# Altium PCB PCB2.PcbDoc
Units mm, origin at the board's own origin, x right, y up, seen from the top; angles counter-clockwise.
Board outline 37 x 50 mm, 2 copper layers (Top Layer, Bottom Layer); 70 components, 56 nets, 273 pads, 147 vias.
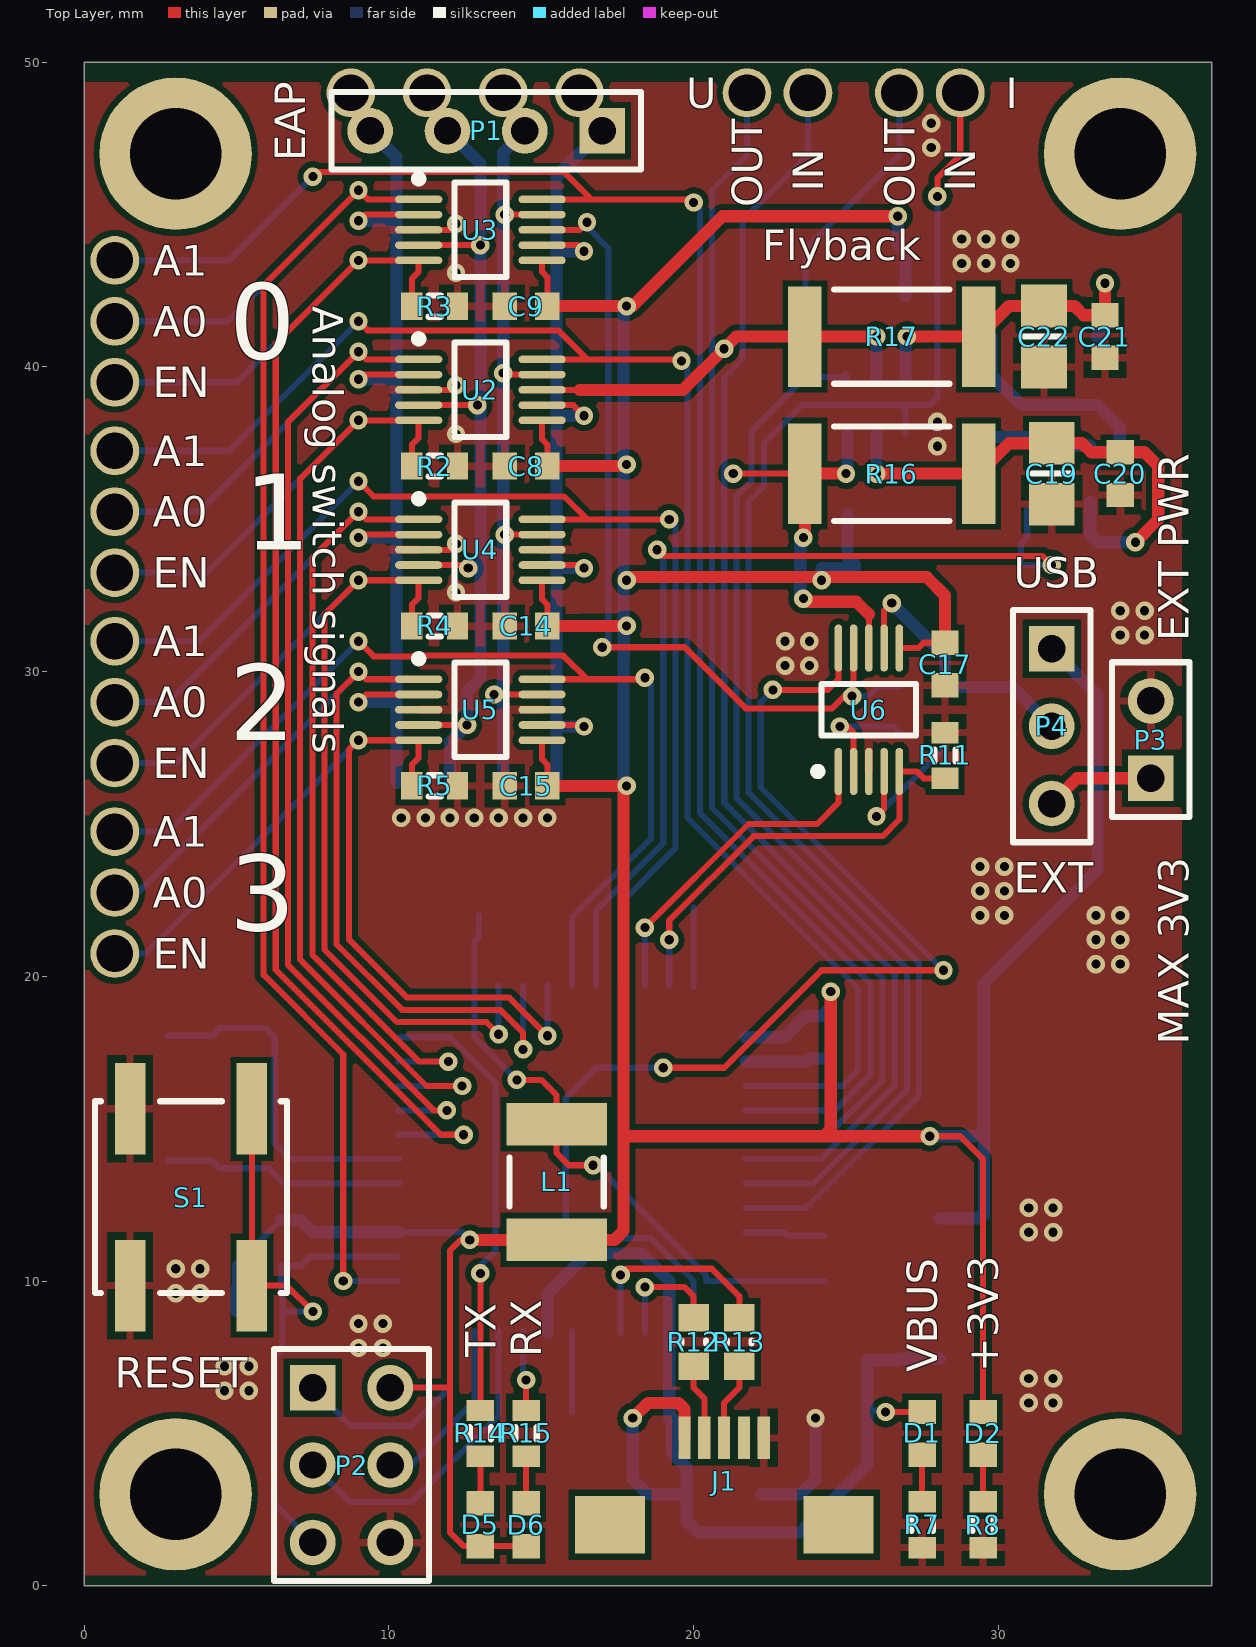
[diagram p0: Top Layer view]
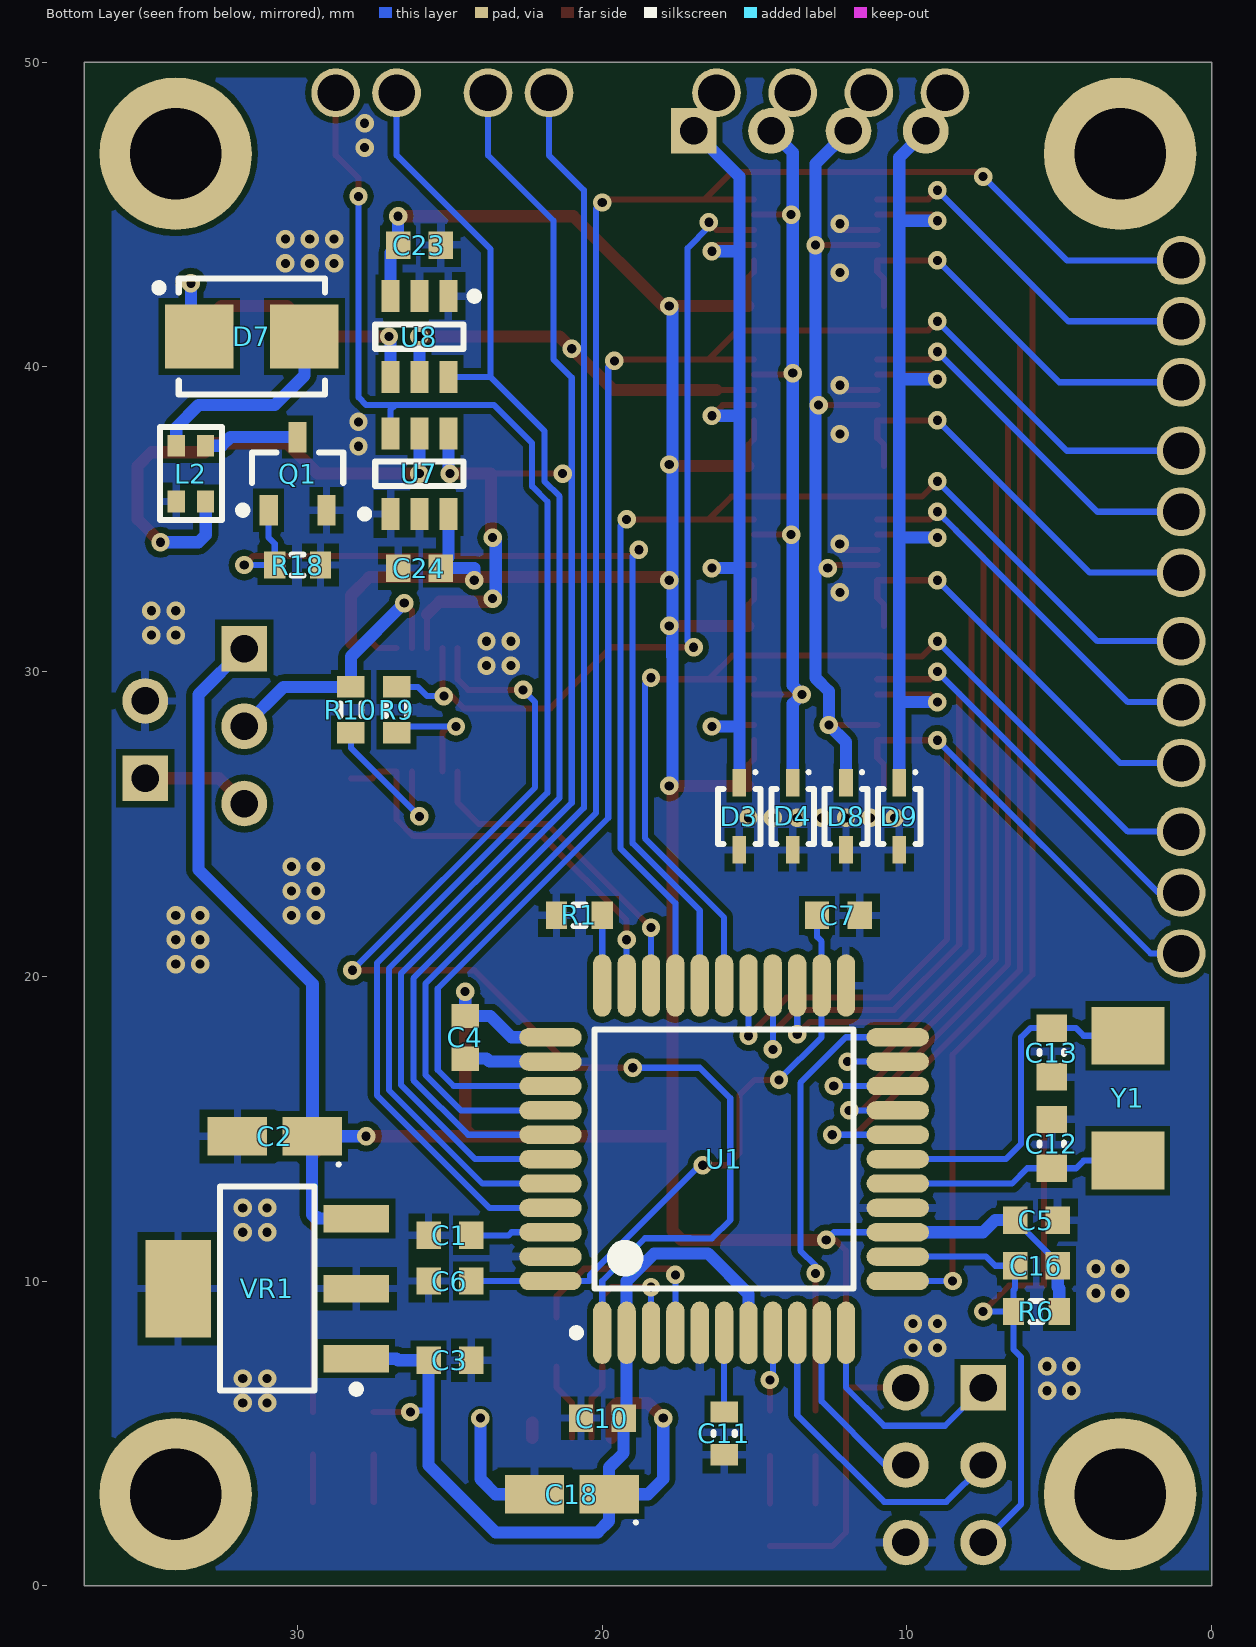
[diagram p1: Bottom Layer view, seen from below]

## Layer stack, top to bottom
Top Solder: solder mask 0.0102, Solder Resist, Dk 3.5
Top Layer: signal copper 0.0356
Dielectric 1: dielectric 0.32, FR-4, Dk 4.8
Bottom Layer: signal copper 0.0356
Bottom Solder: solder mask 0.0102, Solder Resist, Dk 3.5

## Board outline
0,0 37,0 37,50 0,50

## Design rules (kind name [scope] priority, off if disabled: settings)
Clearance "GND polygon clearance" [InNamedPolygon('Bottom Layer-GND') Or  InNamedPolygon('Top Layer-GND')] p1: gap=0.2
Clearance [All] p2: gap=0.2
HoleSize [All] p1: absolutevalues=TRUE maxlimit=6.35 minlimit=0.3 maxpercent=80.000 minpercent=20.000
MinimumAnnularRing [All] p1: minimumring=0.152
MinimumSolderMaskSliver [All] p1: minsoldermaskwidth=0.1
PolygonConnect ViaStiching [IsVia] p1: connectstyle=Direct reliefconductorwidth=0.254 reliefentries=4 polygonreliefangle="90 Angle" airgapwidth=0.254
PolygonConnect [All] p2: connectstyle=Relief reliefconductorwidth=0.254 reliefentries=4 polygonreliefangle="90 Angle" airgapwidth=0.254
RoutingVias [All] p1: holewidth=0.3 width=0.605 viastyle="Through Hole" minholewidth=0.3 minwidth=0.605 maxholewidth=6.35 maxwidth=10
SMDNeckDown [All] p1: percent=100.000
SilkToSolderMaskClearance [IsPad] p1: minsilkscreentomaskgap=0.178 clearancetoexposedcopper=TRUE
SolderMaskExpansion "Vias Covered" [IsVia And (Not IsTestpoint)] p1: expansion=-1270
SolderMaskExpansion "Default All" [All] p2: expansion=0.102
UnpouredPolygon [All] p1: allowunpoured=FALSE
Width "Power lines" [(InNet('3V3') OR InNet('GND') Or InNet('VBUS') Or InNet('EXT_VCC'))] p1: maxlimit=0.5 minlimit=0.2 preferedwidth=0.4
Width [All] p2: maxlimit=0.5 minlimit=0.152 preferedwidth=0.2
26 further rules are at their usual default settings.

## Classes and differential pairs
component class Flyback: C19 C20 C21 C22 C23 C24 D7 L2 Q1 R16 R17 R18 U7 U8

## Components (designator, comment, footprint, x,y, rotation, side; value= is the part's Value field where it differs from the comment)
C1 "Cap Semi" 1608[0603] 25,11.5 r0 bottom
C2 "min 10uF" CAPMP3216X18N 30.75,14.75 r0 bottom
C3 "Cap Semi" 1608[0603] 25,7.4 r0 bottom
C4 "Cap Semi" 1608[0603] 24.5,18 r90 bottom
C5 "Cap Semi" 1608[0603] 5.75,12 r0 bottom
C6 "Cap Semi" 1608[0603] 25,10 r180 bottom
C7 "Cap Semi" 1608[0603] 12.25,22 r0 bottom
C8 "Cap Semi" 1608[0603] 14.5,36.75 r0 top
C9 "Cap Semi" 1608[0603] 14.5,42 r0 top
C10 "Cap Semi" 1608[0603] 20,5.5 r180 bottom
C11 "CAP 1uF 25V 0603(1608)" CAPC0603(1608)100_L 16,5 r90 bottom
C12 "CAP 27pF 50V 0603(1608)" CAPC0603(1608)100_N 5.25,14.5 r270 bottom
C13 "CAP 27pF 50V 0603(1608)" CAPC0603(1608)100_N 5.25,17.5 r90 bottom
C14 "Cap Semi" 1608[0603] 14.5,31.5 r0 top
C15 "Cap Semi" 1608[0603] 14.5,26.25 r0 top
C16 "Cap Semi" 1608[0603] 5.75,10.5 r180 bottom
C17 "Cap Semi" 1608[0603] 28.25,30.25 r90 top
C18 "10uF" CAPMP3216X18N 21,3 r0 bottom
C19 "Cap Semi" 6-0805_M 31.75,36.5 r90 top
C20 "Cap Semi" 1608[0603] 34,36.5 r90 top
C21 "Cap Semi" 1608[0603] 33.5,41 r90 top
C22 "Cap Semi" 6-0805_M 31.5,41 r90 top
C23 "Cap Semi" 1608[0603] 26,44 r0 bottom
C24 "Cap Semi" 1608[0603] 26,33.4 r180 bottom
D1 "Blue" 1608[0603] 27.5,5 r270 top
D2 "Green" 1608[0603] 29.5,5 r270 top
D3 "PMEG2005AEA" SOD323F 15.5,25.25 r270 bottom
D4 "PMEG2005AEA" SOD323F 13.75,25.25 r270 bottom
D5 "Green" 1608[0603] 13,2 r90 top
D6 "Yellow" 1608[0603] 14.5,2 r90 top
D7 "VS-10BQ030PbF" "VS-10BQ030PbF - DIOM4435X24N" 31.5,41 r180 bottom
D8 "PMEG2005AEA" SOD323F 12,25.25 r270 bottom
D9 "PMEG2005AEA" SOD323F 10.25,25.25 r270 bottom
J1 "USB micro B" "FCI MICRO USB B Receptable" 21,2 r0 top
L1 "Inductor" INDC4532 15.5,13.25 r90 top
L2 "COILCRAFT-PFD2015 (Rev)" PFD2015 33.5,36.5 r90 bottom
P1 "Header 4" HDR1X4 17,47.75 r180 top
P2 "ISCP" HDR2X3 7.5,6.5 r270 top
P3 "Header 2" HDR1X2 35,26.5 r90 top
P4 "Jumper" HDR1X3 31.75,30.75 r270 top
Q1 "IRFML8244TRPBF" SOT95P237X112-3N 30,36.5 r90 bottom
R1 "Res3" J1-0603 20.75,22 r180 bottom
R2 "Res3" J1-0603 11.5,36.75 r0 top
R3 "Res3" J1-0603 11.5,42 r0 top
R4 "Res3" J1-0603 11.5,31.5 r0 top
R5 "Res3" J1-0603 11.5,26.25 r0 top
R6 "Res3" J1-0603 5.75,9 r180 bottom
R7 "Res3" J1-0603 27.5,2 r90 top
R8 "Res3" J1-0603 29.5,2 r90 top
R9 "Res3" J1-0603 26.75,28.75 r270 bottom
R10 "Res3" J1-0603 28.25,28.75 r270 bottom
R11 "Res3" J1-0603 28.25,27.25 r90 top
R12 "22R 5% 0603(1608)" RESC0603(1608)_N 20,8 r90 top
R13 "22R 5% 0603(1608)" RESC0603(1608)_N 21.5,8 r90 top
R14 "Res3" J1-0603 13,5 r270 top
R15 "Res3" J1-0603 14.5,5 r270 top
R16 "Res3" RESC6332 26.5,36.5 r0 top
R17 "Res3" RESC6332 26.5,41 r180 top
R18 "Res3" J1-0603 30,33.5 r180 bottom
S1 "KSEM31J" KSEM31J 3.5,12.75 r90 top
U1 "ATmega32U4-AU" 44ML_M 16,14 r90 bottom
U2 "ADG804YRMZ" ADI-RM-10_L 13,39.25 r0 top
U3 "ADG804YRMZ" ADI-RM-10_L 13,44.5 r0 top
U4 "ADG804YRMZ" ADI-RM-10_L 13,34 r0 top
U5 "ADG804YRMZ" ADI-RM-10_L 13,28.75 r0 top
U6 "ADG804YRMZ" ADI-RM-10_L 25.75,28.75 r90 top
U7 "ADM4073" "ADM4073 - SOT95P280X145-6N" 26,36.5 r90 bottom
U8 "ADM4073" "ADM4073 - SOT95P280X145-6N" 26,41 r270 bottom
VR1 "LM2937" "LM2937 - SOT230P700X180-4N" 31,9.75 r0 bottom
Y1 "Abracon ABM3 Crystal" ABM3 2.75,16 r90 bottom

## Footprints (in the part's own frame and the unit in brackets; to place one, negate y for a bottom-side part, rotate by r counter-clockwise, add the part's x,y. Pads: shape width x height; smd on the part's side, far side on the other; paste and mask are expansions set on the pad)
6-0805_M [mm] "Chip Resistor, Body 2.0x1.2mm, IPC Low Density"
  rect 1.4x1.5 smd: 1(-1,0) 2(1,0)
  silkscreen extent 0,-0.65 0,0.65, body extent -1.07,-0.7 1.07,0.7, height 0.7
44ML_M [mm] "Thin QFP, 44-Leads, Body 10x10mm, Pitch 0.8mm, IPC Low Density"
  oval 2.05x0.6 smd: 1(-5.7,4) 2(-5.7,3.2) 3(-5.7,2.4) 4(-5.7,1.6) 5(-5.7,0.8) 6(-5.7,0) 7(-5.7,-0.8) 8(-5.7,-1.6) 9(-5.7,-2.4) 10(-5.7,-3.2) 11(-5.7,-4) 23(5.7,-4) 24(5.7,-3.2) 25(5.7,-2.4) 26(5.7,-1.6) 27(5.7,-0.8) 28(5.7,0) 29(5.7,0.8) 30(5.7,1.6) 31(5.7,2.4) 32(5.7,3.2) 33(5.7,4)
  oval 0.6x2.05 smd: 12(-4,-5.7) 13(-3.2,-5.7) 14(-2.4,-5.7) 15(-1.6,-5.7) 16(-0.8,-5.7) 17(0,-5.7) 18(0.8,-5.7) 19(1.6,-5.7) 20(2.4,-5.7) 21(3.2,-5.7) 22(4,-5.7) 34(4,5.7) 35(3.2,5.7) 36(2.4,5.7) 37(1.6,5.7) 38(0.8,5.7) 39(0,5.7) 40(-0.8,5.7) 41(-1.6,5.7) 42(-2.4,5.7) 43(-3.2,5.7) 44(-4,5.7)
  silkscreen extent -5.82,-4.25 4.25,4.98, body extent -5,-5 5,5, height 1.2
1608[0603] [mm] "Chip Capacitor, Body 1.6x0.8mm, IPC High Density"
  rect 0.8x0.9 smd: 1(-0.7,0) 2(0.7,0)
  body extent -0.87,-0.48 0.87,0.48, height 1.3
ABM3 [mm]
  rect 1.9x2.4 smd: 1(-2.05,0) 2(2.05,0)
  body extent -2.5,-1.6 2.5,1.6, height 1.3
ADI-RM-10_L [mm] "SOP, 10-Leads, Body 3x3mm, Pitch 0.5mm, IPC High Density"
  oval 1.55x0.25 smd: 1(-2.025,1) 2(-2.025,0.5) 3(-2.025,0) 4(-2.025,-0.5) 5(-2.025,-1) 6(2.025,-1) 7(2.025,-0.5) 8(2.025,0) 9(2.025,0.5) 10(2.025,1)
  silkscreen extent -2.15,-1.55 0.85,1.8, body extent -1.55,-1.55 1.55,1.55, height 1.1
"ADM4073 - SOT95P280X145-6N" [mm] "SOT23, 6-Leads, Body 2.90x2.80mm, Pitch 0.95mm, IPC Medium Density"
  rect 1.05x0.6 smd: 1(-1.325,0.95) 2(-1.325,0) 3(-1.325,-0.95) 4(1.325,-0.95) 5(1.325,0) 6(1.325,0.95)
  silkscreen extent -1.45,-1.45 0.4,1.93, body extent -0.8,-1.45 0.8,1.45, height 1.45
CAPC0603(1608)100_L [mm] "Chip Capacitor, Body 1.6x0.8mm, Height 1.0mm, IPC High Density"
  rect 0.7x0.9 smd: 1(-0.7,0) 2(0.7,0)
  silkscreen extent -0.05,-0.35 0.05,0.35, body extent -0.87,-0.47 0.88,0.48, height 1
CAPC0603(1608)100_N [mm] "Chip Capacitor, Body 1.6x0.8mm, Height 1.0mm, IPC Medium Density"
  rect 0.9x1 smd: 1(-0.8,0) 2(0.8,0)
  silkscreen extent -0.05,-0.4 0.05,0.4, body extent -0.87,-0.48 0.88,0.47, height 1
CAPMP3216X18N [mm] "Molded Capacitor, 2-Leads, Body 3.20x1.60mm, IPC Medium Density"
  rect 1.95x1.25 smd: 1(1.225,0) 2(-1.225,0)
  silkscreen extent -2.15,0.88 -2.05,0.97, body extent -1.7,-0.9 1.7,0.9, height 1.8
"FCI MICRO USB B Receptable" [mm]
  rect 2.3x1.9 smd: Case(-3.75,0) Case(3.75,0)
  rect 0.4x1.4 smd: D+(0,2.85) D-(-0.65,2.85) GND(1.3,2.85) ID(0.65,2.85) Vbus(-1.3,2.85)
  body extent -4,-2.75 4,2.85, height 2.95
HDR1X2 [mm] "Connector; Header; 2 Position"
  rect 1.5x1.5 hole 0.9: 1(0,0)
  round 1.5 hole 0.9: 2(2.54,0)
  silkscreen extent -1.27,-1.27 3.81,1.27
HDR1X3 [mm] "Connector; Header; 3 Position"
  rect 1.5x1.5 hole 0.9: 1(0,0)
  round 1.5 hole 0.9: 2(2.54,0) 3(5.08,0)
  silkscreen extent -1.27,-1.27 6.35,1.27
HDR1X4 [mm] "Connector; Header; 4 Position"
  rect 1.5x1.5 hole 0.9: 1(0,0)
  round 1.5 hole 0.9: 2(2.54,0) 3(5.08,0) 4(7.62,0)
  silkscreen extent -1.27,-1.27 8.89,1.27
HDR2X3 [mm] "Connector; Header; 3x2 Position"
  rect 1.5x1.5 hole 0.9: 1(0,0)
  round 1.5 hole 0.9: 2(0,2.54) 3(2.54,0) 4(2.54,2.54) 5(5.08,0) 6(5.08,2.54)
  silkscreen extent -1.27,-1.27 6.35,3.81
INDC4532 [mm] "Chip Inductor, Body 4.5x3.2mm, IPC High Density"
  rect 1.4x3.3 smd: 1(-1.9,0) 2(1.9,0)
  silkscreen extent -0.8,-1.55 0.8,1.55, body extent -2.4,-1.7 2.4,1.7, height 0.55
J1-0603 [mm] "Chip Resistor, Body 1.6x0.8mm, IPC High Density"
  rect 0.7x0.9 smd: 1(-0.75,0) 2(0.75,0)
  silkscreen extent -0.2,-0.35 0.2,0.35, body extent -0.85,-0.48 0.85,0.48, height 0.9
KSEM31J [mm] "Tactile switch"
  rect 3x1 smd: 0(-2.9,-2) 0(2.9,-2) 1(-2.9,2) 1(2.9,2)
  silkscreen extent -3.15,-3.15 3.15,3.15
"LM2937 - SOT230P700X180-4N" [mm] "SOT223, 4-Leads, Body 6.50x7.00mm (avg), Pitch 2.30mm, IPC Medium Density"
  rect 2.15x0.9 smd: 1(-2.925,2.3) 2(-2.925,0) 3(-2.925,-2.3)
  rect 2.15x3.2 smd: 4(2.925,0)
  silkscreen extent -3.05,-3.35 1.55,3.42, body extent -1.85,-3.35 1.85,3.35, height 1.8
PFD2015 [mil] "Coupled inductor"
  rect 28x22 smd: 1(-36,-19) 2(36,-19) 3(36,19) 4(-36,19)
  silkscreen extent -60,-40 60,40
RESC0603(1608)_N [mm] "Chip Resistor, Body 1.6x0.8mm, IPC Medium Density"
  rect 0.9x1 smd: 1(-0.8,0) 2(0.8,0)
  silkscreen extent -0.05,-0.4 0.05,0.4, body extent -0.85,-0.47 0.85,0.47, height 0.6
RESC6332 [mm] "Chip Resistor, Body 6.3x3.2mm, IPC High Density"
  rect 1.1x3.3 smd: 1(-2.85,0) 2(2.85,0)
  silkscreen extent -1.9,-1.55 1.9,1.55, body extent -3.22,-1.68 3.22,1.68, height 0.9
SOD323F [mm] "SODFL, 2-Leads, Body 1.25x2.50mm, IPC Medium Density"
  rect 0.9x0.45 smd: 1(-1.1,0) 2(1.1,0)
  silkscreen extent -1.5,-0.7 0.9,0.7, body extent -0.9,-0.67 0.9,0.67, height 0.8
SOT95P237X112-3N [mm] "SOT23, 3-Leads, Body 2.92x2.37mm, Pitch 0.95mm, IPC Medium Density"
  rect 1x0.6 smd: 1(-1.2,0.95) 2(-1.2,-0.95) 3(1.2,0)
  silkscreen extent -1.32,-1.5 0.7,1.93, body extent -0.7,-1.52 0.7,1.52, height 1.12
"VS-10BQ030PbF - DIOM4435X24N" [mm] "Molded Diode, 2-Leads, Body 4.40x3.55mm, IPC Medium Density"
  rect 2.25x2.1 smd: 1(-1.725,0) 2(1.725,0)
  silkscreen extent -3.18,-1.9 2.4,1.9, body extent -2.35,-1.9 2.35,1.9, height 2.4

## Part data
C1 C3 C4 C5 C6 C7 C8 C9 C10 C14 C15 C16 C17 C19 C20 C21 C22 C23 C24: "Capacitor (Semiconductor SIM Model)"
C2 C18: library part Tantalum
C11: library part CMP-1035-00880-1
C12 C13: library part CMP-1035-00010-1
D1 D2 D5 D6: library part LED2, "Typical RED, GREEN, YELLOW, AMBER GaAs LED"
P1: "Header, 4-Pin"
P2: library part "Header 3X2", "Header, 3-Pin, Dual row"
P3: "Header, 2-Pin"
P4: library part "Header 3", "Header, 3-Pin"
Q1: "INTERNATIONAL RECTIFIER - IRFML8244TRPBF - N CH MOSFET, 25V, 5.8A, 3-SOT-23, FULL REEL"
R1 R2 R3 R4 R5 R6 R7 R8 R9 R10 R11 R14 R15 R16 R17 R18: "Resistor"
R12 R13: library part CMP-1012-00034-1, "22R 0.1W 5% 0603 (1608 Metric)  SMD"
U1: library part CMP-0095-00285-2, "8-bit AVR Microcontroller, 2.7-5.5V, 16MHz, 32KB Flash, 1KB EEPROM, 2.5KB SRAM, USB Controller, 44-pin TQFP, Industrial Grade (-40°C to 85°C), Ext Osc"
U2 U3 U4 U5 U6: library part CMP-0798-00106-1, "1.65 to 3.6 V, CMOS, 0.5 Ohm, 4-Channel Multiplexer, -40 to 125 degC, 10-pin SOP (RM-10), Tube"

## Free pads (board coordinates)
  round 5 hole 3: Mount(3,3) Mount(3,47) Mount(34,3) Mount(34,47)
  round 1.6 hole 1.2: ""(1,20.75) ""(1,22.75) ""(1,24.75) ""(1,27) ""(1,29) ""(1,31) ""(1,33.25) ""(1,35.25) ""(1,37.25) ""(1,39.5) ""(1,41.5) ""(1,43.5) ""(8.75,49) ""(11.25,49) ""(13.75,49) ""(16.25,49) ""(21.75,49) ""(23.75,49) ""(26.75,49) ""(28.75,49)

## Via types
v1: diameter 0.605, hole 0.3, Top Layer to Bottom Layer, 147 vias

## Nets (pads, with @x,y where several pads share a name; then routed paths per layer and width w, separated by ;. In a path a pad name is that pad's centre, name@x,y a point inside that pad or via, vN(x,y) a via of type N, cw(c..) or ccw(c..) an arc to the next point about the centre after c; other vN are vias at no path point)
3V3: C2.2 C4.2 C5.2 C8.2 C9.2 C14.2 C15.2 C16.2 C17.2 C23.2 C24.2 D2.1 D5.1 D6.1 L1.1 P2.2 P4.1 R6.2 U1.14 U1.34 U2.6 U3.6 U4.6 U5.6 U6.6 U7.3 U8.3 VR1.3 | length 165.3
  Top Layer w0.2: P2.2 12,6.5 ; v1(12.65,11.35) 12.35,11.35 12,11 12,6.5 ; D6.1 D5.1 12.45,1.3 12,1.75 12,6.5 ; U5.6 15.025,27.125 15.2,26.95 C15.2 ; U4.6 15.025,32.375 15.2,32.2 C14.2 ; U2.6 15.025,37.625 15.2,37.45 C8.2 ; U3.6 15.025,43.125 15.2,42.95 C9.2 ; U6.6 27.375,30.775 27.55,30.95 C17.2 ; v1(27.75,14.75) 28.75,14.75 29.5,14 D2.1
  Top Layer w0.4: v1(12.65,11.35) L1.1 17.4,11.35 17.697,11.648 17.697,26.147 v1(17.8,26.25) C15.2 ; C8.2 17.75,36.75 v1(17.8,36.8) ; C14.2 16.307,31.5 16.309,31.502 v1(17.8,31.502) ; C9.2 v1(17.8,42) 18,42 20.95,44.95 v1(26.7,44.95) ; 17.697,14.75 24.25,14.75 ; v1(17.8,33) 17.903,33.103 27.647,33.103 28.25,32.5 C17.2 ; v1(24.5,19.5) 24.5,15 24.25,14.75 ; v1(27.75,14.75) 24.25,14.75
  Bottom Layer w0.2: C16.2 5.05,10.6 C5.2 ; U1.14 12.4,11.6 v1(12.65,11.35) ; C4.2@24.25,18.7 C4.2@24.25,18.75
  Bottom Layer w0.4: R6.2 5,9.75 5.05,9.8 C16.2 ; C5.2 7.1,12 7.5,11.6 U1.14 ; v1(17.8,26.25) 17.697,26.353 17.697,30.504 17.702,30.509 17.702,31.091 17.697,31.096 17.697,41.897 v1(17.8,42) ; U1.34 22.975,18 23.675,18.7 C4.2@24.25,18.7 ; v1(24.2,33) 24.2,33.4 C24.2@25.2,33.4 ; C4.2@24.25,18.75 24.5,19 v1(24.5,19.5) ; U7.3 25.05,33.75 25.3,33.5 C24.2@25.2,33.4 ; C24.2 C24.2@25.2,33.4 ; v1(26.7,44.95) C23.2 26.95,43.75 U8.3 ; v1(27.75,14.75) 29.5,14.75 29.5,19.75 29.525,19.775 ; VR1.3 29.3,12.05 29.35,12.1 ; 29.4,12.05 29.525,12.175 C2.2 29.525,19.775 ; P4.1 33.25,29.25 33.25,23.5 29.525,19.775
A0_0: pad.@1,41.5 U1.12 U3.1 | length 51.9
  Top Layer w0.2: v1(8.5,10) 8.5,17.434 5.883,20.051 5.883,42.683 v1(9,45.8) 9.3,45.5 U3.1
  Bottom Layer w0.2: pad.@1,41.5 4.7,41.5 v1(9,45.8) ; v1(8.5,10) U1.12
A0_1: pad.@1,35.25 U1.19 U2.1 | length 42.1
  Top Layer w0.2: U2.1 9.25,40.25 v1(9,40.5) 6.683,38.183 6.683,20.382 11.466,15.6 v1(11.9,15.6)
  Bottom Layer w0.2: pad.@1,35.25 3.75,35.25 v1(9,40.5) ; U1.19 v1(11.9,15.6)
A0_2: pad.@1,29 U1.21 U4.1 | length 35.4
  Top Layer w0.2: U4.1 9.252,35 9.002,35.25 v1(9,35.25) 8.998,35.25 7.483,33.735 7.483,20.714 10.997,17.2 v1(11.95,17.2)
  Bottom Layer w0.2: pad.@1,29 2.75,29 8.397,34.647 8.397,34.65 8.998,35.25 v1(9,35.25) ; U1.21 v1(11.95,17.2)
A0_3: pad.@1,22.75 U1.26 U5.1 | length 32.3
  Top Layer w0.2: U5.1 9.25,29.75 v1(9,30) 8.283,29.283 8.283,21.045 10.428,18.9 13.652,18.9 14.4,18.152 v1(14.4,17.6)
  Bottom Layer w0.2: pad.@1,22.75 1.75,22.75 v1(9,30) ; v1(14.4,17.6) U1.26
A0_4: U1.31 U6.1 | length 11
  Top Layer w0.2: v1(18.4,21.6) 21.8,25 24.05,25 24.75,25.7 U6.1
  Bottom Layer w0.2: U1.31 v1(18.4,21.6)
A1_0: pad.@1,43.5 U1.37 U3.10 | length 58
  Top Layer w0.2: v1(7.5,46.25) 7.652,46.402 15.735,46.402 16.6,45.538 16.6,45.5 ; U3.10 16.6,45.5 ; v1(20,45.4) 20.1,45.5 16.6,45.5
  Bottom Layer w0.2: pad.@1,43.5 4.75,43.5 v1(7.5,46.25) ; v1(20,45.4) 20.202,45.198 20.202,40.45 20.202,34.585 20.202,25.363 25.8,19.766 25.8,16.76 24.64,15.6 U1.37
A1_1: pad.@1,37.25 U1.36 U2.10 | length 52
  Top Layer w0.2: v1(9,41.5) 9.3,41.2 15.55,41.2 16.5,40.25 ; U2.10 16.5,40.25 ; v1(19.6,40.2) 19.55,40.25 16.5,40.25
  Bottom Layer w0.2: pad.@1,37.25 4.75,37.25 v1(9,41.5) ; v1(19.6,40.2) 19.802,39.998 19.802,35.25 19.803,34.75 19.802,25.198 25.4,19.6 25.4,16.926 24.874,16.4 U1.36
A1_2: pad.@1,31 U1.30 U4.10 | length 40
  Top Layer w0.2: v1(9,36.25) 9.5,35.75 15.75,35.75 16.5,35 ; v1(19.2,35) 16.5,35 ; 16.5,35 U4.10 16.5,35
  Bottom Layer w0.2: pad.@1,31 3.75,31 v1(9,36.25) ; U1.30 17.6,22.4 19.402,24.202 19.402,34.249 19.4,34.252 19.4,34.8 v1(19.2,35)
A1_3: pad.@1,24.75 U1.28 U5.10 | length 35.2
  Top Layer w0.2: v1(9,31) 9.5,30.5 10.784,30.5 10.809,30.525 15.725,30.525 16.5,29.75 ; v1(18.4,29.8) 18.55,29.8 18.6,29.75 16.5,29.75 ; 16.5,29.75 U5.10 16.5,29.75
  Bottom Layer w0.2: pad.@1,24.75 2.75,24.75 v1(9,31) ; U1.28 16,21.931 18.603,24.534 18.603,29.597 v1(18.4,29.8)
A1_4: U1.1 U6.10 | length 40
  Top Layer w0.2: v1(19,17) 21,17 24.2,20.2 v1(28.2,20.2) ; v1(22.6,29.4) 24.4,29.4 24.75,29.75 U6.10
  Bottom Layer w0.2: v1(19,17) 16.8,17 15.8,16 15.8,12 16.4,11.4 17.099,11.4 17.102,11.402 18.597,11.402 20,10 U1.1 ; v1(22.6,29.4) 22.202,29.002 22.202,26.198 v1(28.2,20.2)
EAP_IN: pad.@21.75,49 R17.2 U1.38 U2.8 U8.5 | length 53.9
  Top Layer w0.2: U2.8 16.25,39.25
  Top Layer w0.4: 16.25,39.25 19.65,39.25 v1(21,40.6) 21.4,41 R17.2 v1(26,41)
  Bottom Layer w0.2: 20.602,40.6 v1(21,40.6) ; 20.602,40.615 20.602,34.419 20.602,25.529 26.2,19.931 26.2,16.594 24.406,14.8 U1.38 ; 20.602,40.615 20.602,45.15 20.603,45.65 20.602,45.802 21.75,46.95 pad.@21.75,49
  Bottom Layer w0.4: U8.5 v1(26,41)
EAP_IN_CURRENT: pad.@26.75,49 U1.40 U8.6 | length 45.3
  Bottom Layer w0.2: U1.40 23.937,13.2 27,16.263 27,20.263 21.402,25.86 21.402,34.088 21.402,35.75 21.903,36.25 21.903,37.902 23.675,39.675 ; U8.6@24.975,39.75 U8.6 23.675,39.675 ; pad.@26.75,49 26.75,46.95 23.675,43.875 23.675,39.675
EAP_OUT: R9.1 U3.8 U6.9 | length 28.3
  Top Layer w0.2: U3.8 16.25,44.5 v1(16.5,44.75) ; v1(17,30.8) 19.7,30.8 21.703,28.797 24.545,28.797 24.973,29.225 v1@25.175,29.225 ; v1@25.2,29.25 25.25,29.3 U6.9
  Bottom Layer w0.2: v1(16.5,44.75) 16.5,44.602 17.2,43.902 17.2,42.252 17.197,42.25 17.197,32.75 17.197,30.997 v1(17,30.8) ; v1(25.2,29.2) 25.75,29.2 26.05,29.5 R9.1
EN_0: pad.@1,39.5 R3.1 U1.18 U3.5 | length 48.2
  Top Layer w0.2: R3.1 10.75,42.9 10.975,43.125 U3.5 v1(9,43.5) 6.283,40.783 6.283,20.217 11.7,14.8 v1(12.45,14.8)
  Bottom Layer w0.2: pad.@1,39.5 5,39.5 v1(9,43.5) ; U1.18 v1(12.45,14.8)
EN_1: pad.@1,33.25 R2.1 U1.20 U2.5 | length 41.3
  Top Layer w0.2: R2.1 10.75,37.45 10.975,37.675 U2.5 v1(9,38.25) 7.083,36.333 7.083,20.548 11.231,16.4 v1(12.4,16.4)
  Bottom Layer w0.2: pad.@1,33.25 4,33.25 v1(9,38.25) ; U1.20 v1(12.4,16.4)
EN_2: pad.@1,27 R4.1 U1.25 U4.5 | length 35.1
  Top Layer w0.2: R4.1 10.75,32.2 10.975,32.425 U4.5 v1(9,33) 7.883,31.883 7.883,20.88 10.263,18.5 13.2,18.5 v1(13.6,18.1)
  Bottom Layer w0.2: pad.@1,27 3,27 v1(9,33) ; v1(13.6,18.1) U1.25
EN_3: pad.@1,20.75 R5.1 U1.27 U5.5 | length 30.6
  Top Layer w0.2: R5.1 10.75,26.95 10.975,27.175 U5.5 v1(9,27.75) 8.683,27.433 8.683,21.211 10.594,19.3 13.95,19.3 v1(15.2,18.05)
  Bottom Layer w0.2: pad.@1,20.75 2,20.75 v1(9,27.75) ; v1(15.2,18.05) U1.27
EN_4: R11.1 U1.32 U6.5 | length 14.2
  Top Layer w0.2: v1(19.2,21.2) 19.2,21.834 21.966,24.6 26.202,24.6 26.75,25.148 U6.5 27.325,26.725 27.55,26.5 R11.1
  Bottom Layer w0.2: U1.32 v1(19.2,21.2)
EXT_VCC: P3.1 P4.3 | length 3.6
  Top Layer w0.4: P4.3 32.58,26.5 P3.1
FLYBACK_CONTROL: Q1.1 R18.1 U1.29 | length 31.3
  Top Layer w0.2: v1(18.8,34) 19.002,33.797 23.85,33.797 23.852,33.8 31.45,33.8 v1(31.75,33.5)
  Bottom Layer w0.2: U1.29 16.8,22.166 19.002,24.368 19.002,33.797 v1(18.8,34) ; Q1.1 30.95,34.4 30.75,34.2 R18.1 v1(31.75,33.5)
FLYBACK_IN: pad.@23.75,49 R16.1 U1.39 U6.8 U7.4 | length 54.7
  Top Layer w0.2: v1(21.3,36.5) R16.1 ; U6.8 25.75,31.885
  Top Layer w0.4: v1(23.6,32.4) 23.703,32.297 25.337,32.297 25.75,31.885 ; v1(23.6,34.4) 23.65,34.45 R16.1 v1(25,36.5)
  Bottom Layer w0.2: U1.39 24.171,14 26.6,16.429 26.6,20.097 21.002,25.695 21.002,34.253 21.002,39.652 21.603,40.253 21.603,40.85 21.6,40.852 21.6,44.8 23.75,46.95 pad.@23.75,49
  Bottom Layer w0.4: v1(23.6,32.4) 23.497,32.503 23.497,34.297 v1(23.6,34.4) ; v1(25,36.5) 25.05,36.55 U7.4
FLYBACK_IN_CURRENT: pad.@28.75,49 U1.41 U7.6 | length 48.8
  Top Layer w0.2: v1(28,45.6) 28,46.2 28.75,46.95 pad.@28.75,49
  Bottom Layer w0.2: U1.41 23.703,12.4 27.4,16.097 27.4,20.428 21.802,26.026 21.802,33.922 21.802,35.585 22.303,36.085 22.303,37.503 23.55,38.75 26.8,38.75 ; U7.6 26.95,38.6 26.8,38.75 ; v1(28,45.6) 28,39 27.75,38.75 26.8,38.75
GND: C1.2 C2.1 C3.1 C4.1 C5.1 C6.1 C7.1 C8.1 C9.1 C10.1 C11.1 C12.1 C13.1 C14.1 C15.1 C17.1 C18.1 C19.1 C20.1 C21.1 C22.1 C23.1 C24.1 D3.2 D4.2 D8.2 D9.2 J1.GND L2.4 P2.6 P3.2 Q1.2 R1.1 R2.2 R3.2 R4.2 R5.2 R7.1 R8.1 R11.2 R18.2 S1.1 U1.5 U1.15 U1.23 U1.35 U1.43 U2.3 U3.3 U4.3 U4.8 U5.3 U5.8 U6.3 U7.1 U7.2 U8.1 U8.2 VR1.2 VR1.4 | length 11.2
  Top Layer w0.2: U4.3 12,34 12.194,34.194 v1(12.206,34.194) ; U2.3 12,39.25 12.15,39.4 v1(12.2,39.4) ; U3.3 12,44.5 v1(12.2,44.7)
  Top Layer w0.4: J1.GND J1.GND@22.3,5.35
  Bottom Layer w0.4: U1.35 23.7,17.2 23.8,17.3 C4.1 ; C18.1 23.5,3 24,3.5 v1(24,5.5)
  other v1: 31,6 31.8,6 4.6,6.4 5.4,6.4 31,6.8 31.8,6.8 4.6,7.2 5.4,7.2 9,7.8 9.8,7.8 9,8.6 9.8,8.6 3,9.6 3.8,9.6 3,10.4 3.8,10.4 31,11.6 31.8,11.6 31,12.4 31.8,12.4 33.2,20.4 34,20.4 33.2,21.2 34,21.2 29.4,22 30.2,22 33.2,22 34,22 29.4,22.8 30.2,22.8 29.4,23.6 30.2,23.6 10.4,25.2 11.2,25.2 12,25.2 12.8,25.2 13.6,25.2 14.4,25.2 15.2,25.2 23,30.2 23.8,30.2 23,31 23.8,31 34,31.2 34.8,31.2 34,32 34.8,32 12.2,32.6 28,37.4 12.2,37.8 28,38.2 12.2,43.1 28.8,43.4 29.6,43.4 30.4,43.4 28.8,44.2 29.6,44.2 30.4,44.2 27.8,47.2 27.8,48
MISO: P2.1 U1.11 | length 7.4
  Bottom Layer w0.2: P2.1 8.75,5.25 10.75,5.25 12,6.5 U1.11@12,8.35
MOSI: P2.4 U1.10 | length 5.9
  Bottom Layer w0.2: P2.4 10.71,3.96 12.8,6.05 U1.10@12.8,8.35
NetC1_1: C1.1 U1.42 | length 2.6
  Bottom Layer w0.2: U1.42 22.975,11.6 23.075,11.5 C1.1
NetC6_2: C6.2 C7.2 L1.2 U1.24 U1.44 | length 20.1
  Top Layer w0.2: v1(14.2,16.6) 15,16.6 15.5,16.1 L1.2 15.5,14.2 15.9,13.8 v1(16.7,13.8)
  Bottom Layer w0.2: C7.2 12.95,21.3 12.8,21.15 U1.24 12.8,18 v1(14.2,16.6) ; v1(16.7,13.8) 16.8,13.8 20.4,10.2 20.4,10.025 20.425,10 U1.44 22.975,10 C6.2
NetC11_2: C11.2 U1.6 | length 2.6
  Bottom Layer w0.2: C11.2 U1.6@16,8.35
NetC12_2: C12.2 U1.16 Y1.1 | length 7.9
  Bottom Layer w0.2: Y1.1 4.2,13.95 4.45,13.7 C12.2 6.05,13.7 6.55,13.2 U1.16@10.35,13.2
NetC13_2: C13.2 U1.17 Y1.2 | length 11.5
  Bottom Layer w0.2: Y1.2 4.2,18.05 4.45,18.3 C13.2 5.95,18.3 6.25,18 6.25,14.5 6.75,14 U1.17@10.35,14
NetC19_2: C19.2 C20.2 L2.1 R16.2 U7.5 | length 16.8
  Top Layer w0.4: v1(26,36.5) R16.2 30.35,37.5 C19.2 32.75,37.5 33.05,37.2 C20.2 34.8,37.2 35.25,36.75 35.25,35 v1(34.5,34.25)
  Bottom Layer w0.4: v1(26,36.5) U7.5 ; L2.1 33.017,34.483 33.25,34.25 v1(34.5,34.25)
NetC21_2: C21.2 C22.2 D7.1 R17.1 U8.4 | length 11.3
  Top Layer w0.4: v1(27,41) R17.1 30.35,42 C22.2 32.5,42 32.8,41.7 C21.2 v1(33.5,42.75)
  Bottom Layer w0.4: U8.4 26.95,40.95 v1(27,41) ; D7.1 33.5,41.275 v1(33.5,42.75)
NetD1_2: D1.2 R7.2 | length 1.5
  Top Layer w0.2: R7.2 D1.2
NetD2_2: D2.2 R8.2 | length 1.5
  Top Layer w0.2: R8.2 D2.2
NetD3_1: D3.1 P1.1 pad.@16.25,49 U2.7 U3.7 U4.7 U5.7 | length 33
  Top Layer w0.2: U5.7 16.35,28.25 v1(16.4,28.2) ; U4.7 16.3,33.5 v1(16.4,33.4) ; U2.7 16.05,38.75 v1(16.4,38.4) ; U3.7 16.2,44 v1(16.4,43.8) ; pad.@16,49 P1.1@17,48
  Bottom Layer w0.4: D3.1 15.5,28.2 ; v1(16.4,28.2) 15.5,28.2 ; v1(16.4,33.4) 15.5,33.4 ; v1(16.4,38.4) 15.5,38.4 ; v1(16.4,43.8) 15.5,43.8 ; P1.1@16.875,47.875 P1.1@17,48 ; P1.1 15.5,46.25 15.5,43.8 ; 15.5,28.2 15.5,33.4 ; 15.5,33.4 15.5,38.4 ; 15.5,38.4 15.5,43.8
NetD4_1: D4.1 P1.2 pad.@13.75,49 U2.9 U3.9 U4.9 U5.9 | length 28.5
  Top Layer w0.2: v1(13.45,29.25) U5.9 ; v1(13.75,39.8) 13.95,39.8 14,39.75 U2.9 ; pad.@13.75,49 14.46,48.04 P1.2@14.46,48 ; v1(13.8,34.5) U4.9 ; v1(13.8,45) U3.9
  Bottom Layer w0.4: D4.1 13.75,28.95 v1(13.45,29.25) 13.75,29.55 v1(13.75,39.8) 13.75,47.04 P1.2
NetD5_2: D5.2 R14.2 | length 1.5
  Top Layer w0.2: D5.2 R14.2
NetD6_2: D6.2 R15.2 | length 1.5
  Top Layer w0.2: D6.2 R15.2
NetD7_2: D7.2 L2.3 | length 6.8
  Bottom Layer w0.4: D7.2 29.775,39.725 30.75,38.75 33.25,38.75 33.983,38.017 L2.3
NetD8_1: D8.1 P1.3 pad.@11.25,49 U2.4 U3.4 U4.4 U5.4 | length 31
  Top Layer w0.2: U5.4 v1(12.562,28.25) ; U4.4 v1@12.6,33.5 ; U2.4 v1(12.9,38.75) ; U3.4 v1(13,44) ; pad.@11.25,49 11.92,48.08 P1.3@11.92,48
  Bottom Layer w0.4: P1.3 13,46.67 v1(13,44) 13,33.4 ; D8.1 12,27.688 v1(12.562,28.25) 12.562,29.356 13,29.793 13,33.4 ; v1(12.6,33.4) 13,33.4
NetD9_1: D9.1 P1.4 pad.@8.75,49 U2.2 U3.2 U4.2 U5.2 | length 36.2
  Top Layer w0.2: pad.@8.75,49 9.38,48.12 P1.4@9.38,48 ; v1(9,29) 9.25,29.25 U5.2 ; v1(9,34.4) 9.1,34.5 U4.2 ; v1(9,39.6) 9.15,39.75 U2.2 ; v1(9,44.8) 9.2,45 U3.2
  Bottom Layer w0.4: v1(9,29) 10.25,29 ; v1(9,34.4) 10.25,34.4 ; v1(9,39.6) 10.25,39.6 ; v1(9,44.8) 10.25,44.8 ; P1.4 10.25,46.88 10.25,44.8 ; D9.1 10.25,29 ; 10.25,29 10.25,34.4 ; 10.25,34.4 10.25,39.6 ; 10.25,39.6 10.25,44.8
NetJ1_D+: J1.D+ R13.1 | length 2.6
  Top Layer w0.2: J1.D+ 21,6 21.5,6.5 R13.1
NetJ1_D-: J1.D- R12.1 | length 2.5
  Top Layer w0.2: R12.1 20,6.5 20.35,6.15 J1.D-
NetL2_2: L2.2 Q1.3 | length 3.1
  Bottom Layer w0.4: Q1.3 32.202,37.7 32.488,37.414 L2.2
NetP4_2: P4.2 R10.1 U6.7 | length 9.1
  Top Layer w0.2: U6.7 26.25,32 v1(26.5,32.25)
  Bottom Layer w0.4: v1(26.5,32.25) 28.25,30.5 R10.1 30.46,29.5 P4.2
NetR1_2: R1.2 U1.33 | length 2.6
  Bottom Layer w0.2: U1.33@20,19.65 R1.2@20,22.25
NetR9_2: R9.2 U6.2 | length 3.8
  Top Layer w0.2: v1(24.8,28.2) 25.05,28.2 25.25,28 U6.2
  Bottom Layer w0.2: v1(24.8,28.2) 26.55,28.2 R9.2
NetR10_2: R10.2 U6.4 | length 5.3
  Top Layer w0.2: v1(26,25.25) 26.25,25.5 U6.4
  Bottom Layer w0.2: v1(26,25.25) 28.25,27.5 R10.2
RST: C16.1 P2.5 R6.1 S1.0 U1.13 | length 22.8
  Top Layer w0.2: S1.0@5.5,15.65 5.5,9.85 6.65,9.85 v1(7.5,9)
  Bottom Layer w0.2: 6.25,7.5 6.25,2.67 P2.5 ; 6.25,7.5 6.5,7.75 R6.1 ; v1(7.5,9) R6.1 ; U1.13 7.4,10.8 7.1,10.5 C16.1 6.45,9.75 6.5,9.7 R6.1
RXLED: R15.1 U1.8 | length 2.6
  Top Layer w0.2: R15.1 v1(14.5,6.75)
  Bottom Layer w0.2: U1.8@14.4,8.35 U1.8 14.4,6.85 v1(14.5,6.75)
SCK: P2.3 U1.9 | length 10.5
  Bottom Layer w0.2: P2.3 8.71,2.75 10.75,2.75 13.6,5.6 U1.9@13.6,8.35
TXLED: R14.1 U1.22 | length 14.7
  Top Layer w0.2: R14.1 v1(13,10.25)
  Bottom Layer w0.2: U1.22@10.35,18 12.002,18 13.5,16.502 13.5,11 13,10.5 v1(13,10.25)
USB_D+: R13.2 U1.4 | length 7
  Top Layer w0.2: v1(17.6,10.2) 17.803,10.403 20.598,10.403 21.5,9.5 R13.2
  Bottom Layer w0.2: U1.4 v1(17.6,10.2)
USB_D-: R12.2 U1.3 | length 3.9
  Top Layer w0.2: v1(18.4,9.8) 19.7,9.8 20,9.5 R12.2
  Bottom Layer w0.2: U1.3 v1(18.4,9.8)
VBUS: C3.2 C10.2 C18.2 D1.1 J1.Vbus U1.2 U1.7 VR1.1 | length 35.8
  Top Layer w0.2: v1(26.3,5.7) D1.1
  Top Layer w0.4: v1(18,5.5) 18.5,6 19.5,6 19.7,5.8 J1.Vbus
  Bottom Layer w0.2: 25.75,5.75 26.25,5.75 v1(26.3,5.7)
  Bottom Layer w0.4: U1.7 15.2,9.575 16.525,10.9 17.307,10.9 17.309,10.903 18.297,10.903 19.2,10 U1.2 C10.2@19.2,5.5 ; v1(18,5.5) 18,3.5 18.5,3 C18.2 ; C10.2 19.3,4.35 19.775,3.875 C18.2 ; VR1.1 26.75,7.45 26.7,7.4 C3.2 25.7,3.95 23.5,1.75 20.15,1.75 19.775,2.125 C18.2
pads on no net: J1.Case J1.ID

## Polygon pours and split planes (outlines as drawn)
GND on Bottom Layer "Bottom Layer-GND" (solid, remove dead copper, pour order 19): 0.1,49.5 0.1,0.5 36.1,0.5 36.1,49.5
GND on Top Layer "Top Layer-GND" (solid, remove dead copper, pour order 3): 36.017,49.35 0.017,49.35 0.017,0.35 36.017,0.35

## Silkscreen, mask and mechanical layers (free items; w line width, h text height)
Top Overlay:
  text "U" at 19.75,48.5 h1
  text "I" at 30.25,48.5 h1
  text "EAP" at 7.25,46.75 h1 r90
  text "IN" at 24.25,45.75 h1 r90
  text "IN" at 29.25,45.75 h1 r90
  text "OUT" at 22.25,45.25 h1 r90
  text "OUT" at 27.25,45.25 h1 r90
  text "Flyback" at 22.25,43.5 h1
  text "A1" at 2.25,43 h1
  text "Analog switch signals" at 7.5,42 h1 r270
  text "A0" at 2.25,41 h1
  text "0" at 4.75,40.25 h2.5
  text "EN" at 2.25,39 h1
  text "A1" at 2.25,36.75 h1
  text "A0" at 2.25,34.75 h1
  text "1" at 5.25,34 h2.5
  text "EN" at 2.25,32.75 h1
  text "USB" at 30.5,32.75 h1
  text "EXT PWR" at 36.25,31 h1 r90
  text "A1" at 2.25,30.5 h1
  text "A0" at 2.25,28.5 h1
  text "2" at 4.75,27.75 h2.5
  text "EN" at 2.25,26.5 h1
  text "A1" at 2.25,24.25 h1
  text "EXT" at 30.5,22.75 h1
  text "A0" at 2.25,22.25 h1
  text "3" at 4.75,21.5 h2.5
  text "EN" at 2.25,20.25 h1
  text "MAX 3V3" at 36.25,17.75 h1 r90
  text "TX" at 13.5,7.5 h1 r90
  text "RX" at 15,7.5 h1 r90
  text "VBUS" at 28,7 h1 r90
  text "+3V3" at 30,7 h1 r90
  text "RESET" at 1,6.5 h1